# Allegro board NIXIECUBEBOARD_V1_1.brd
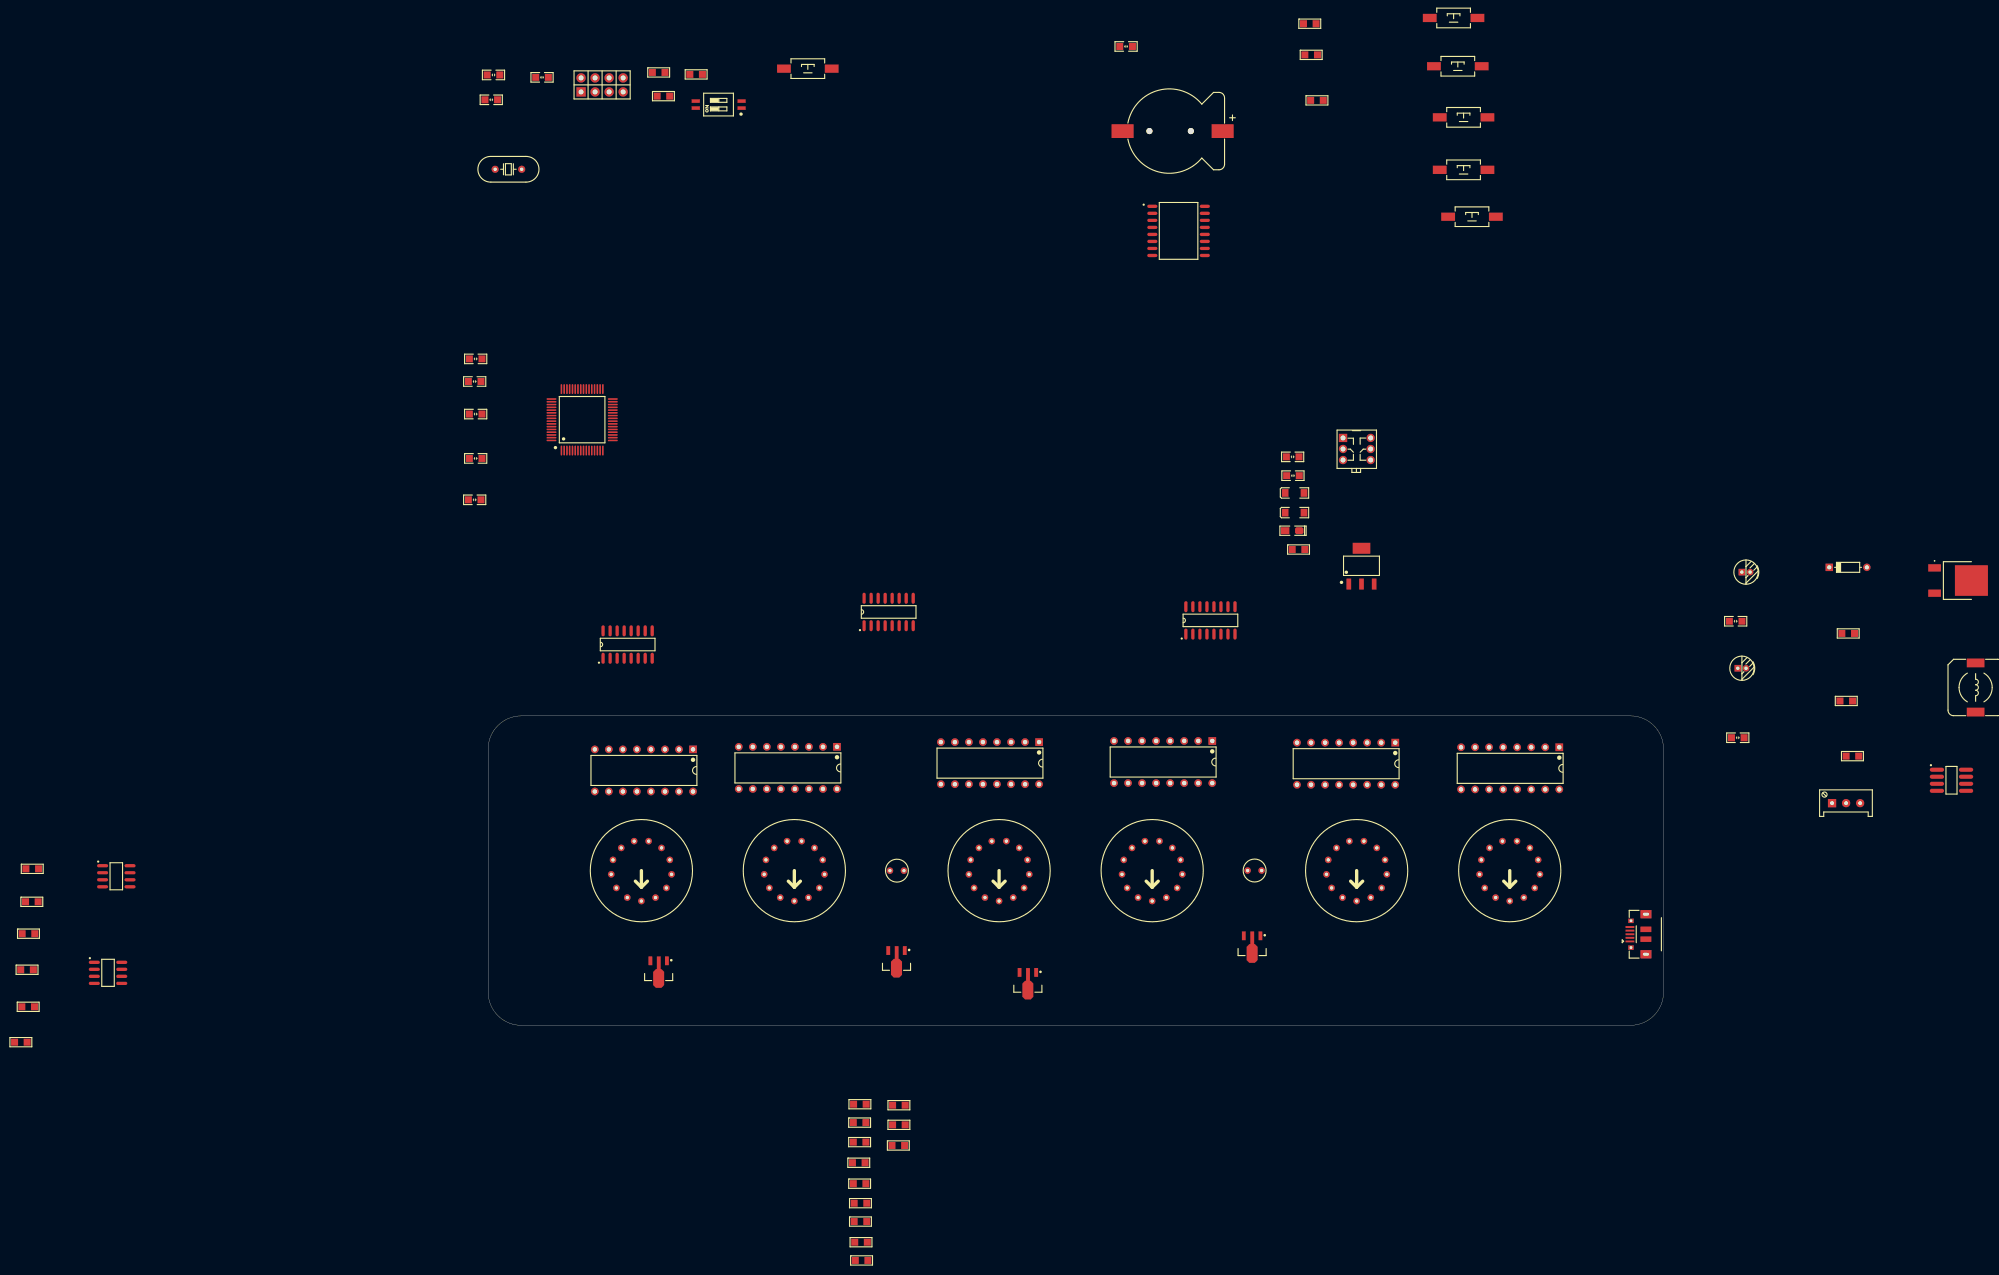
[diagram p0: board, top side]
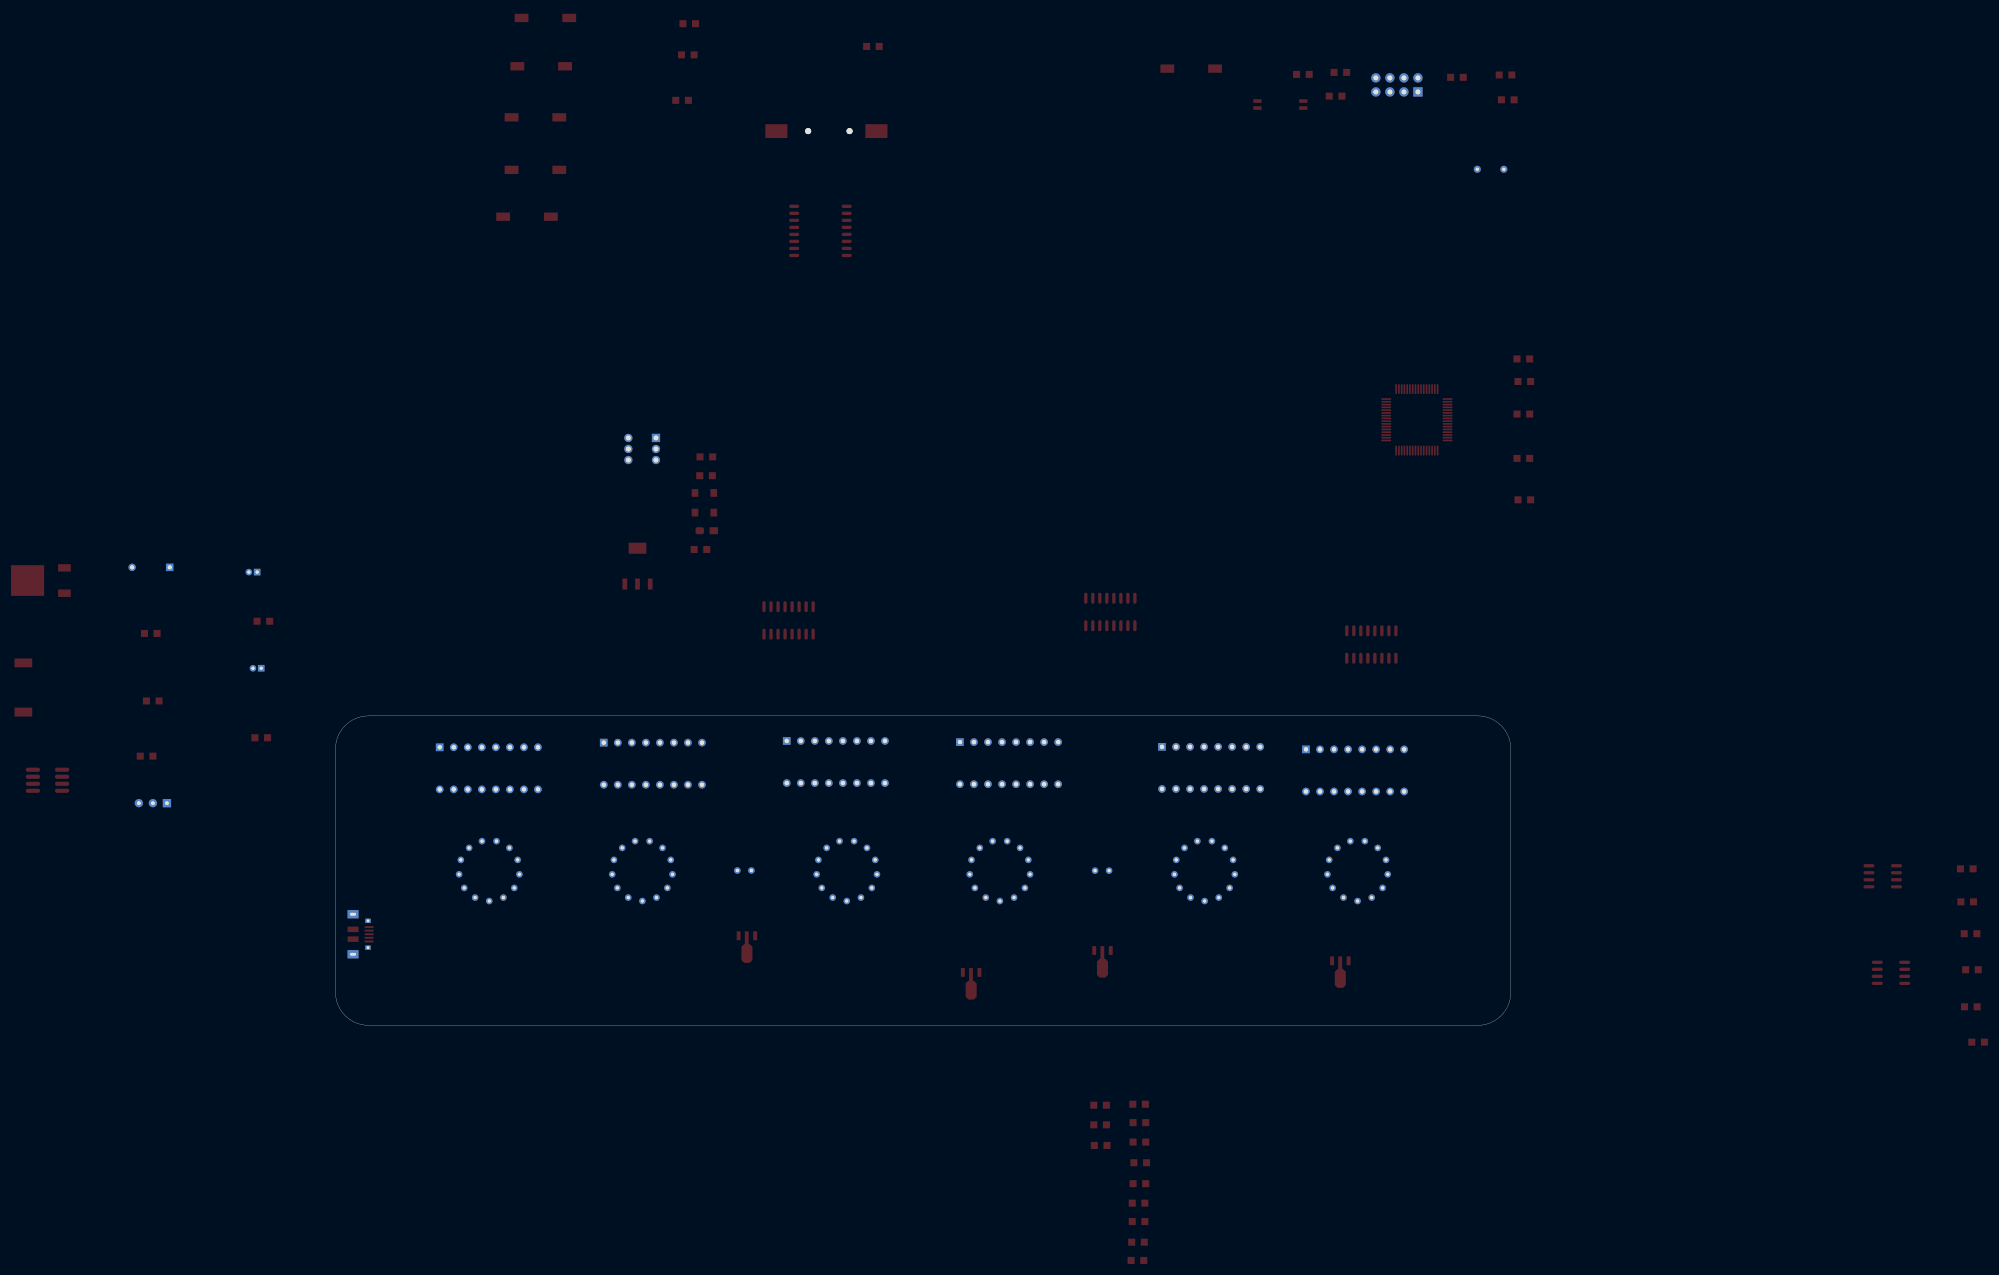
[diagram p1: board, bottom side, seen from below]

Outline 212.75 x 56 mm; copper layers: TOP, GND, VCC, BOTTOM. Coordinates in mm from the lower left corner of the outline.
Outline path: 0,50 arc(1.76,54.24) 6,56 206.75,56 arc(210.99,54.24) 212.75,50 212.75,6 arc(210.99,1.76) 206.75,0 6,0 arc(1.76,1.76) 0,6 0,50

## Design rules (mm)
constraint set DEFAULT: min track width 0.203, pair gap 0.203
net group CLS_CENTER: nets OSC_IN OSC_OUT
net group CLS_POWER: nets GND VCC_5V

## Placement (name value [footprint] x y rotation side)
C1  104  [C_0805_M]  145.62 102.87 0 top
C2  104  [C_0805_M]  115.47 177.14 0 top
C3  104  [C_0805_M]  145.67 99.47 0 top
C4  104  [C_0805_M]  0.97 171.98 0 top
C5  22p  [C_0805_M]  0.56 167.49 0 top
C6  104  [C_0805_M]  -2.26 120.6 0 top
C7  104  [C_0805_M]  -2.44 116.51 0 top
C8  104  [C_0805_M]  -2.26 110.62 0 top
C9  104  [C_0805_M]  -2.26 102.59 0 top
C10  104  [C_0805_M]  -2.44 95.1 0 top
C11  22p  [C_0805_M]  9.75 171.55 0 top
C12  100uF  [CAP_1_5X4X8]  226.92 82.02 0 top
C13  0.1u  [C_0805_M]  225.81 73.13 0 top
C14  50u  [CAP_1_5X4X8]  226.19 64.62 0 top
C15  47p  [C_0805_M]  226.19 52.04 0 top
CR1  CR_3V  [CR1220_A]  123.29 161.82 0 top
D1  BAV21  [DO_35]  246.15 82.88 0 top
E1  10u/12v  [CD_A3216]  145.97 96.34 0 top
E2  10u/12v  [CD_A3216]  145.97 92.79 0 top
HY1  Nixie_Bulb_HM  [NIXIEBULB_2_54]  72.72 27.99 0 top
HY2  Nixie_Bulb_HM  [NIXIEBULB_2_54]  137.46 28.02 0 top
JP1  Header_2_54_2X4P  [HDR2_54_LI_2X4P]  16.81 168.91 0 top
L1  220uH  [CDRH104R]  269.24 61.14 0 top
LED1  LED_R  [LED_0805]  145.54 89.51 0 top
M1  TK8P65W  [TO458P1000X230-3N]  266.06 80.49 0 top
Q1  MJE13001_FR  [SOT89]  30.86 9.63 180 top
Q2  MJE13001_FR  [SOT89]  97.69 7.52 180 top
Q3  MJE13001_FR  [SOT89]  73.91 11.48 180 top
Q4  MJE13001_FR  [SOT89]  138.28 14.15 180 top
R1  2k  [R_0805_M]  145.54 86.11 0 top
R2  10k  [R_0805_M]  147.57 181.25 0 top
R3  10k  [R_0805_M]  147.83 175.62 0 top
R4  10k  [R_0805_M]  148.87 167.39 0 top
R5  10k  [R_0805_M]  29.72 172.44 0 top
R6  10k  [R_0805_M]  30.58 168.15 0 top
R7  10k  [R_0805_M]  36.5 172.09 0 top
R8  1.8M  [R_0805_M]  245.03 70.92 0 top
R9  2.4k  [R_0805_M]  -83.67 28.32 0 top
R10  2.4k  [R_0805_M]  -83.74 22.35 0 top
R11  4.7k  [R_0805_M]  -84.35 16.59 0 top
R12  4.7k  [R_0805_M]  -84.61 10.06 0 top
R13  2.4k  [R_0805_M]  -84.4 3.35 0 top
R14  4.7k  [R_0805_M]  -85.72 -3.05 0 top
R15  50m  [R_0805_M]  244.68 58.7 0 top
R16  13k  [R_0805_M]  245.8 48.72 0 top
R17  5k  [3296W]  245.8 40.21 0 top
R18  20k  [R_0805_M]  66.14 -14.27 0 top
R19  1k  [R_0805_M]  66.09 -17.6 0 top
R20  20k  [R_0805_M]  66.09 -21.13 0 top
R21  500k  [R_0805_M]  65.94 -24.87 0 top
R22  20k  [R_0805_M]  66.09 -28.65 0 top
R23  1k  [R_0805_M]  66.24 -32.18 0 top
R24  20k  [R_0805_M]  66.24 -35.51 0 top
R25  500k  [R_0805_M]  66.34 -39.24 0 top
R26  20k  [R_0805_M]  66.45 -42.55 0 top
R27  20k  [R_0805_M]  73.2 -14.45 0 top
R28  1k  [R_0805_M]  73.2 -18.01 0 top
R29  1k  [R_0805_M]  73.1 -21.74 0 top
SW1  Sw_TSW_SMD_3x6x4_3  [TSW_SMD_3_0_6_0_4_3]  170.43 182.3 0 top
SW2  KEY_7X7  [KFT_DIP_7X7]  154.74 106.3 0 top
SW3  Sw_TSW_SMD_3x6x4_3  [TSW_SMD_3_0_6_0_4_3]  171.2 173.56 0 top
SW4  Sw_TSW_SMD_3x6x4_3  [TSW_SMD_3_0_6_0_4_3]  172.24 164.31 0 top
SW5  Sw_TSW_SMD_3x6x4_3  [TSW_SMD_3_0_6_0_4_3]  172.24 154.81 0 top
SW6  Sw_TSW_SMD_3x6x4_3  [TSW_SMD_3_0_6_0_4_3]  173.76 146.33 0 top
SW7  CSW_2P  [CSW_1_27_SMD_2P]  45.87 165.99 0 top
SW8  Sw_TSW_SMD_3x6x4_3  [TSW_SMD_3_0_6_0_4_3]  53.54 173.13 0 top
T1  -  [IN_14]  27.74 27.99 180 top
T2  -  [IN_14]  55.42 27.99 180 top
T3  -  [IN_14]  92.48 27.99 180 top
T4  -  [IN_14]  120.19 27.99 180 top
T5  -  [IN_14]  157.2 27.99 180 top
T6  -  [IN_14]  184.91 27.99 180 top
U1  DS3231  [SOP16_W]  124.97 143.76 0 top
U2  STM32F103RC  [LQFP64_10X10]  13.26 104.01 0 top
U3  MAX1771  [SOP8]  264.87 44.35 0 top
U4  AO48XX  [SOIC127P600X150-8N]  -67.31 26.97 0 top
U5  AO48XX  [SOIC127P600X150-8N]  -68.81 9.5 0 top
U6  SN74141  [DIP16_300]  28.19 46.13 270 top
U7  74HC595D  [SOP127P600X140-16N]  25.25 68.91 90 top
U8  SN74141  [DIP16_300]  54.25 46.58 270 top
U9  74HC595D  [SOP127P600X140-16N]  72.49 74.8 90 top
U10  SN74141  [DIP16_300]  90.83 47.45 270 top
U11  SN74141  [DIP16_300]  122.17 47.65 270 top
U12  74HC595D  [SOP127P600X140-16N]  130.73 73.28 90 top
U13  SN74141  [DIP16_300]  155.3 47.35 270 top
U14  SN74141  [DIP16_300]  184.99 46.51 270 top
USB1  USB_5P  [USB_MICRO_A]  206.67 16.48 90 top
V1  AMS1117_3V3  [SOT223_N]  155.78 79.86 0 top
Y1  8MHz  [OSC_HC_49S]  1.27 154.91 0 top

## Library data of the parts
C1-C11 C13 C15 = C_0805
C12 C14 = C_CAP_1_5
CR1 = CR_3V
D1 = BAV21
E1 E2 = E_0805
HY1 HY2 = Nixie_Bulb
JP1 = Header_2_54_2X4P
L1 = L_CDRH104R
LED1 = LED_0805
M1 = TK8P65W
Q1-Q4 = MJE13001_FR
R1-R16 R18-R29 = R_0805
R17 = RP_3296w
SW1 SW3-SW6 SW8 = Sw_TSW_SMD_3x6x4_3
SW2 = KEY_7X7
SW7 = CSW_2P
T1-T6 = IN_14
U1 = DS3231
U2 = STM32F103RC
U3 = MAX1771
U4 U5 = AO48XX
U6 U8 U10 U11 U13 U14 = SN74141N
U7 U9 U12 = 74HC595D
USB1 = USB_5P
V1 = AMS1117_3V3
Y1 = OSC_49S

## Footprints (pads in the part's own frame, mm; a bottom-side part is the same pattern mirrored in y, then rotated)
3296W
  rect 1.5x1.5 hole 0.7: 1(-2.54,0)
  round 1.5 hole 0.7: 2(0,0) 3(2.54,0)
C_0805_M
  rect 1.27x1.27 smd: 1(-1.143,0) 2(1.143,0)
CAP_1_5X4X8
  rect 1.2x1.2 hole 0.6: 1(0,0)
  round 1.2 hole 0.6: 2(1.5,0)
CD_A3216
  rect 1.2x1.4 smd: 1(-1.7,0) 2(1.7,0)
CDRH104R
  rect 3.2x1.6 smd: 1(0,4.45) 2(0,-4.45)
CR1220_A
  round 1.1 hole 1.1 unplated: (-3.6,0) (3.9,0)
  rect 4x2.5 smd: 1(9.652,0) 2(-8.458,0)
CSW_1_27_SMD_2P
  rect 1.5x0.65 smd: 1(0,0) 2(0,1.27) 3(-8.3,1.27) 4(-8.3,0)
DIP16_300
  rect 1.4x1.4 hole 0.8: 1(-3.81,8.89)
  round 1.4 hole 0.8: 2(-3.81,6.35) 3(-3.81,3.81) 4(-3.81,1.27) 5(-3.81,-1.27) 6(-3.81,-3.81) 7(-3.81,-6.35) 8(-3.81,-8.89) 9(3.81,-8.89) 10(3.81,-6.35) 11(3.81,-3.81) 12(3.81,-1.27) 13(3.81,1.27) 14(3.81,3.81) 15(3.81,6.35) 16(3.81,8.89)
DO_35
  round 1.35 hole 0.75: 1(3.4,0)
  rect 1.35x1.35 hole 0.75: 2(-3.4,0)
HDR2_54_LI_2X4P
  rect 1.7x1.7 hole 0.9: 1(0,0)
  round 1.7 hole 0.9: 2(0,2.54) 3(2.54,0) 4(2.54,2.54) 5(5.08,0) 6(5.08,2.54) 7(7.62,0) 8(7.62,2.54)
IN_14
  round 1.2 hole 0.6: 1(0,5.5) 2(2.556,4.87) 3(4.526,3.124) 4(5.46,0.663) 5(5.143,-1.95) 6(3.647,-4.117) 7(1.316,-5.34) 8(-1.316,-5.34) 9(-3.647,-4.117) 10(-5.143,-1.951) 11(-5.46,0.663) 12(-4.527,3.124) 13(-2.556,4.87)
KFT_DIP_7X7
  rect 1.5x1.5 hole 0.9: 1(0,0)
  round 1.5 hole 0.9: 2(0,-2) 3(0,-4) 4(5,-4) 5(5,-2) 6(5,0)
LED_0805
  rect 1.524x1.27 smd: 1(-1.27,0)
  rrect 1.524x1.27 smd: 2(1.27,0)
LQFP64_10X10
  oval 0.3x1.8 smd: 1(0,0) 2(0.5,0) 3(1,0) 4(1.5,0) 5(2,0) 6(2.5,0) 7(3,0) 8(3.5,0) 9(4,0) 10(4.5,0) 11(5,0) 12(5.5,0) 13(6,0) 14(6.5,0) 15(7,0) 16(7.5,0) 33(7.5,11.125) 34(7,11.125) 35(6.5,11.125) 36(6,11.125) 37(5.5,11.125) 38(5,11.125) 39(4.5,11.125) 40(4,11.125) 41(3.5,11.125) 42(3,11.125) 43(2.5,11.125) 44(2,11.125) 45(1.5,11.125) 46(1,11.125) 47(0.5,11.125) 48(0,11.125)
  oval 1.8x0.3 smd: 17(9.3,1.825) 18(9.3,2.325) 19(9.3,2.825) 20(9.3,3.325) 21(9.3,3.825) 22(9.3,4.325) 23(9.3,4.825) 24(9.3,5.325) 25(9.3,5.825) 26(9.3,6.325) 27(9.3,6.825) 28(9.3,7.325) 29(9.3,7.825) 30(9.3,8.325) 31(9.3,8.825) 32(9.3,9.325) 49(-1.8,9.325) 50(-1.8,8.825) 51(-1.8,8.325) 52(-1.8,7.825) 53(-1.8,7.325) 54(-1.8,6.825) 55(-1.8,6.325) 56(-1.8,5.825) 57(-1.8,5.325) 58(-1.8,4.825) 59(-1.8,4.325) 60(-1.8,3.825) 61(-1.8,3.325) 62(-1.8,2.825) 63(-1.8,2.325) 64(-1.8,1.825)
NIXIEBULB_2_54
  round 1.2 hole 0.6: 1(0,0) 2(2.54,0)
OSC_HC_49S
  round 1.3 hole 0.6: 1(0,0) 2(4.8,0)
R_0805_M
  rect 1.27x1.27 smd: 1(0,0) 2(2.286,0)
SOIC127P600X150-8N
  oval 2x0.6 smd: 1(-2.482,1.905) 2(-2.482,0.635) 3(-2.482,-0.635) 4(-2.482,-1.905) 5(2.482,-1.905) 6(2.482,-0.635) 7(2.482,0.635) 8(2.482,1.905)
SOP8
  oval 2.575x0.75 smd: 1(-2.638,1.905) 2(-2.638,0.635) 3(-2.638,-0.635) 4(-2.638,-1.905) 5(2.638,-1.905) 6(2.638,-0.635) 7(2.638,0.635) 8(2.638,1.905)
SOP16_W
  oval 1.825x0.6 smd: 1(-4.753,4.445) 2(-4.753,3.175) 3(-4.753,1.905) 4(-4.753,0.635) 5(-4.753,-0.635) 6(-4.753,-1.905) 7(-4.753,-3.175) 8(-4.753,-4.445) 9(4.753,-4.445) 10(4.753,-3.175) 11(4.753,-1.905) 12(4.753,-0.635) 13(4.753,0.635) 14(4.753,1.905) 15(4.753,3.175) 16(4.753,4.445)
SOP127P600X140-16N
  oval 2x0.6 smd: 1(-2.482,4.445) 2(-2.482,3.175) 3(-2.482,1.905) 4(-2.482,0.635) 5(-2.482,-0.635) 6(-2.482,-1.905) 7(-2.482,-3.175) 8(-2.482,-4.445) 9(2.482,-4.445) 10(2.482,-3.175) 11(2.482,-1.905) 12(2.482,-0.635) 13(2.482,0.635) 14(2.482,1.905) 15(2.482,3.175) 16(2.482,4.445)
SOT89
  rect 0.7x1.6 smd: 1(-1.5,-2.054) 3(1.5,-2.054)
  custom 2x5.694 smd: 2(0,0)
SOT223_N
  rect 3.2x2 smd: (2.3,6.477)
  rect 0.85x2 smd: 1(0,0) 2(2.3,0) 3(4.6,0)
TO458P1000X230-3N
  rect 2.295x1.34 smd: 1(-4.258,2.29) 3(-4.258,-2.29)
  rect 5.985x5.54 smd: 2(2.413,0)
TSW_SMD_3_0_6_0_4_3
  rect 2.5x1.5 smd: 1(0,0) 2(8.636,0)
USB_MICRO_A
  rect 1.5x2 hole 0.5x1.1: (-3.625,-2.9) (3.625,-2.9)
  rect 0.8x1 hole 0.5: (-2.425,-0.19) (2.425,-0.19)
  rect 1x2 smd: (-0.889,-2.89) (0.889,-2.89)
  rect 0.35x1.6 smd: 1(-1.3,0) 2(-0.65,0) 3(0,0) 4(0.65,0) 5(1.3,0)

## Nets
GND: C1.1 C2.1 C3.1 C4.1 C5.1 C6.1 C7.1 C8.1 C9.1 C10.1 C11.1 C12.2 C13.1 C14.2 C15.1 CR1.2(V-) E1.2 E2.2 HY1.2 HY2.2 JP1.7 JP1.8 LED1.2 R5.2 R6.2 R15.1 R17.2 R17.3 R21.1 R25.1 SW1.1 SW2.6 SW3.1 SW4.2 SW5.1 SW6.1 SW8.1 U1.5 U1.6 U1.7 U1.8 U1.9 U1.10 U1.11 U1.12 U1.13 U2.12(VSSA) U2.18 U2.31 U2.47 U2.63 U3.4 U3.6 U3.7 U6.12 U7.8 U7.13 U8.12 U9.8 U9.13 U10.12 U11.12 U12.8 U12.13 U13.12 U14.12 V1.1
VCC_3V3: C3.2 C6.2 C7.2 C8.2 C9.2 C10.2 E2.1 JP1.1 JP1.2 R2.2 R3.2 R4.2 R7.2 R9.2 R10.2 R13.2 SW7.1 SW7.2 U1.2(VCC) U2.1 U2.13 U2.19 U2.32 U2.48 U2.64 U4.2 U4.4 U5.2 V1.2(VOUT)
VCC_5V: C1.2 C12.1 E1.1 L1.1 R1.1 R11.2 R12.2 R14.2 SW2.1 U3.2(V+) U6.5(VCC) U7.10 U7.16(VCC) U8.5(VCC) U9.10 U9.16(VCC) U10.5(VCC) U11.5(VCC) U12.10 U12.16(VCC) U13.5(VCC) U14.5(VCC) V1.3
VCC_170V: C14.1 D1.2 Q1.2 Q2.2 Q3.2 Q4.2 R8.2 R18.2 R20.2 R22.2 R24.2 R26.2 R27.2
595_RCLK: R12.1 U4.5 U4.6 U7.12 U9.12 U12.12
595_SER: R14.1 U5.7 U5.8 U7.14
595_SHCKL: R11.1 U4.7 U4.8 U7.11 U9.11 U12.11
BOOT0: R6.1 SW7.4 U2.60
BOOT1: R5.1 SW7.3 U2.28
DS_INT: R2.1 U1.3 U2.11
DS_SCL: R3.1 U1.16 U2.9
DS_SDA: R4.1 U1.15 U2.10
HV1_IN1: U6.3 U7.15
HV1_IN2: U6.6 U7.1
HV1_IN3: U6.7 U7.2
HV1_IN4: U6.4 U7.3
HV2_IN1: U7.4 U10.3
HV2_IN2: U7.5 U10.6
HV2_IN3: U7.6 U10.7
HV2_IN4: U7.7 U10.4
HV3_IN1: U9.15 U13.3
HV3_IN2: U9.1 U13.6
HV3_IN3: U9.2 U13.7
HV3_IN4: U9.3 U13.4
HV4_IN1: U8.3 U9.4
HV4_IN2: U8.6 U9.5
HV4_IN3: U8.7 U9.6
HV4_IN4: U8.4 U9.7
HV5_IN1: U11.3 U12.15
HV5_IN2: U11.6 U12.1
HV5_IN3: U11.7 U12.2
HV5_IN4: U11.4 U12.3
HV6_IN1: U12.4 U14.3
HV6_IN2: U12.5 U14.6
HV6_IN3: U12.6 U14.7
HV6_IN4: U12.7 U14.4
HVOUT1_0: T1.3 U6.16
HVOUT1_1: T1.12 U6.15
HVOUT1_2: T1.11 U6.8
HVOUT1_3: T1.10 U6.9
HVOUT1_4: T1.9 U6.13
HVOUT1_5: T1.8 U6.14
HVOUT1_6: T1.7 U6.11
HVOUT1_7: T1.6 U6.10
HVOUT1_8: T1.5 U6.1
HVOUT1_9: T1.4 U6.2
HVOUT2_0: T3.3 U10.16
HVOUT2_1: T3.12 U10.15
HVOUT2_2: T3.11 U10.8
HVOUT2_3: T3.10 U10.9
HVOUT2_4: T3.9 U10.13
HVOUT2_5: T3.8 U10.14
HVOUT2_6: T3.7 U10.11
HVOUT2_7: T3.6 U10.10
HVOUT2_8: T3.5 U10.1
HVOUT2_9: T3.4 U10.2
HVOUT3_0: T5.3 U13.16
HVOUT3_1: T5.12 U13.15
HVOUT3_2: T5.11 U13.8
HVOUT3_3: T5.10 U13.9
HVOUT3_4: T5.9 U13.13
HVOUT3_5: T5.8 U13.14
HVOUT3_6: T5.7 U13.11
HVOUT3_7: T5.6 U13.10
HVOUT3_8: T5.5 U13.1
HVOUT3_9: T5.4 U13.2
HVOUT4_0: T2.3 U8.16
HVOUT4_1: T2.12 U8.15
HVOUT4_2: T2.11 U8.8
HVOUT4_3: T2.10 U8.9
HVOUT4_4: T2.9 U8.13
HVOUT4_5: T2.8 U8.14
HVOUT4_6: T2.7 U8.11
HVOUT4_7: T2.6 U8.10
HVOUT4_8: T2.5 U8.1
HVOUT4_9: T2.4 U8.2
HVOUT5_0: T4.3 U11.16
HVOUT5_1: T4.12 U11.15
HVOUT5_2: T4.11 U11.8
HVOUT5_3: T4.10 U11.9
HVOUT5_4: T4.9 U11.13
HVOUT5_5: T4.8 U11.14
HVOUT5_6: T4.7 U11.11
HVOUT5_7: T4.6 U11.10
HVOUT5_8: T4.5 U11.1
HVOUT5_9: T4.4 U11.2
HVOUT6_0: T6.3 U14.16
HVOUT6_1: T6.12 U14.15
HVOUT6_2: T6.11 U14.8
HVOUT6_3: T6.10 U14.9
HVOUT6_4: T6.9 U14.13
HVOUT6_5: T6.8 U14.14
HVOUT6_6: T6.7 U14.11
HVOUT6_7: T6.6 U14.10
HVOUT6_8: T6.5 U14.1
HVOUT6_9: T6.4 U14.2
JTCK: JP1.6 U2.49
JTMS: JP1.4 U2.46
MCU_1ST_POINT: R19.2 U2.39
MCU_2ND_POINT: R23.2 U2.40
MCU_HM_POINTS: R28.2 U2.37
MCU_MS_POINTS: R29.2 U2.38
MCU_RCLK: R9.1 U2.35 U4.3
MCU_SER: R13.1 U2.36 U5.1(S2)
MCU_SHCLK: R10.1 U2.34 U4.1(S2)
OSC_IN: C5.2 U2.5 Y1.2
OSC_OUT: C11.2 U2.6 Y1.1
QH1: U7.9 U9.14
QH2: U9.9 U12.14
REST: C4.2 R7.1 SW8.2 U2.7
RXD: JP1.5 U2.43
TXD: JP1.3 U2.42
USER_KEY_1: SW1.2 U2.15
USER_KEY_2: SW3.2 U2.16
USER_KEY_3: SW5.2 U2.17
USER_KEY_4: SW6.2 U2.20
N190043: LED1.1 R1.2
N197522: SW2.2 USB1.1
N197526: SW2.5 USB1.5
N207950: C2.2 CR1.1 U1.14
N208570: SW4.1 U1.4
N216390: C13.2 U3.5
N216624: M1.1 U3.1
N216628: D1.1 L1.2 M1.2
N216761: C15.2 R8.1 R16.2 U3.3
N216816: M1.3(S) R15.2 U3.8
N227446: R18.1 T1.1
N230597: Q1.3(E) R21.2 T1.13(DOT_R)
N267621: R26.1 T5.1
N268120: R20.1 T2.1
N268851: R27.1 T6.1
N281018: HY1.1 Q3.3(E)
N281362: Q3.1 R28.1
N281563: Q4.1 R29.1
N281567: HY2.1 Q4.3(E)
N282725: Q1.1 R19.1
N283315: Q2.1 R23.1
N283323: Q2.3(E) R25.2 T2.13(DOT_R)
N291179: R16.1 R17.1
N313152: R22.1 T3.1
N313679: R24.1 T4.1

Pads without a net: SW2 3 4; T1 2; T2 2; T3 2 13; T4 2 13; T5 2 13; T6 2 13; U1 1; U2 2 3 4 8 14 21 22 23 24 25 26 27 29 30 33 41 44 45 50 51 52 53 54 55 56 57 58 59 61 62; U5 3 4 5 6; U12 9; USB1 2 3 4
